# EAGLE board LipoSaverR (EAGLE 6.4)
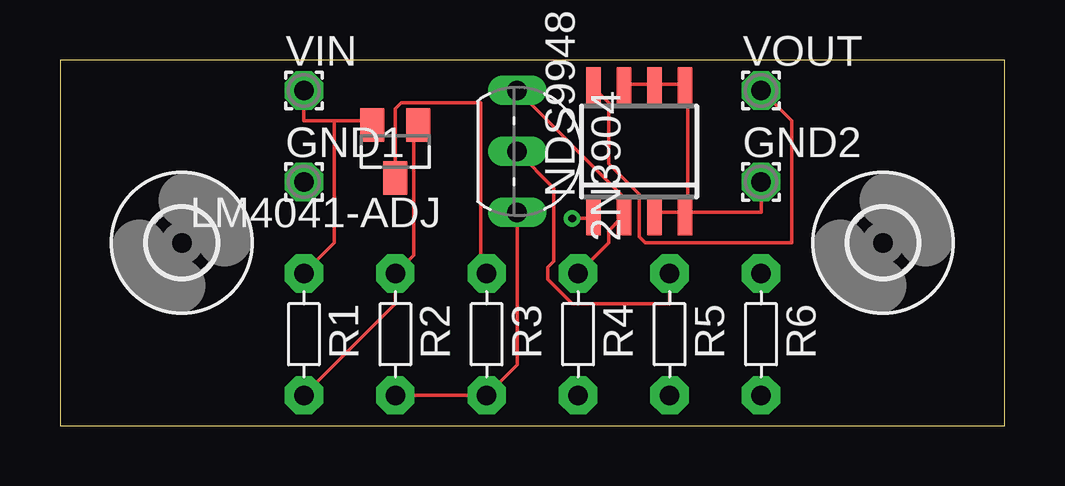
[diagram p0: board, top side]
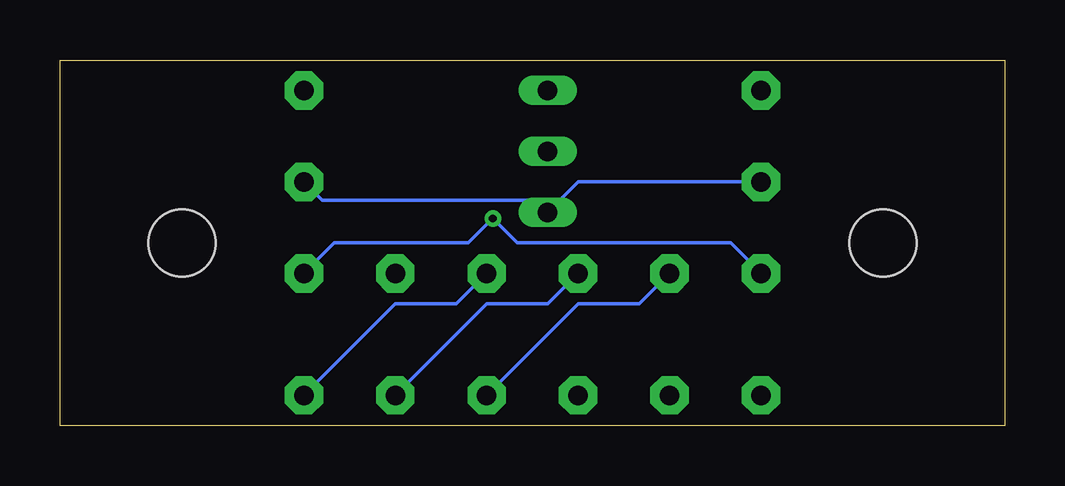
[diagram p1: board, bottom side, seen from below]

Size 39.37 x 15.24 mm. Coordinates in mm from the lower left corner, seen from the top.
Outline: 0,15.24 0,0 39.37,0 39.37,15.24 0,15.24
Copper layers (1*16): Top 0.0356mm / dielectric 1.5011mm / Bottom 0.0356mm
Design rules "LaenPCBOrder": minimum track width 6mil, minimum drill 13mil, track to track 6mil, track to pad 6mil, pad to pad 6mil, via to via 6mil, smd to smd 6mil, copper to edge 15mil, drill to drill 6mil, minimum pad ring 7mil, minimum via ring 7mil, stop-mask expansion 4mil, vias tented up to drill 0mil, thermal gap 10mil

## Footprints (pad centres in the part's own frame; a part is rotated, then mirrored left to right if it is on the bottom)
TO92-EBC = drill 0.813 long: B 0,-1.27; C -2.54,-1.27; E 2.54,-1.27
2,8 = hole 2.8: 0,0
1,6/0,8 = drill 0.813 pad 1.6 octagon: 1 0,0
SOT23 = smd 1 x 1.4: 1 -0.95,-1.1; 2 0.95,-1.1; 3 0,1.1
SOIC8 = smd 0.6 x 1.5: 1 -1.905,-2.75; 2 -0.635,-2.75; 3 0.635,-2.75; 4 1.905,-2.75; 5 1.905,2.75; 6 0.635,2.75; 7 -0.635,2.75; 8 -1.905,2.75
R-5 = drill 0.813 pad 1.6 octagon: 1 -2.54,0; 2 2.54,0

## Placement (x,y rotation side)
2N3904  [TO92-EBC]  20.32,11.43 270 top
E$40  [2,8]  5.08,7.62 0 top
E$42  [2,8]  34.29,7.62 0 top
GND1  [1,6/0,8]  10.16,10.16 0 top
GND2  [1,6/0,8]  29.21,10.16 0 top
LM4041-ADJ  [SOT23]  13.97,11.43 180 top
NDS9948  [SOIC8]  24.13,11.43 0 top
R1  R1  [R-5]  10.16,3.81 270 top
R2  R2  [R-5]  13.97,3.81 270 top
R3  10K  [R-5]  17.78,3.81 270 top
R4  4.7M  [R-5]  21.59,3.81 270 top
R5  100K  [R-5]  25.4,3.81 270 top
R6  20K  [R-5]  29.21,3.81 270 top
VIN  [1,6/0,8]  10.16,13.97 0 top
VOUT  [1,6/0,8]  29.21,13.97 0 top

## Library data of the parts
2N3904 = transistor-npn
E$40 E$42 = holes
GND1 GND2 VIN VOUT = wirepad
LM4041-ADJ = transistor-fet
NDS9948 = linear
R1-R6 = discrete

## Nets
S$1: 2N3904.E GND1.1 GND2.1 NDS9948.3 NDS9948.4 NDS9948.5 NDS9948.6 NDS9948.7 R2.2 R3.2
S$2: LM4041-ADJ.2 NDS9948.1 R1.1 R6.1 VIN.1
S$3: LM4041-ADJ.3 R3.1 R5.2
S$4: 2N3904.C NDS9948.2 R4.1 R6.2
S$5: 2N3904.B R5.1
S$6: NDS9948.8 VOUT.1
S$11: LM4041-ADJ.1 R1.2 R2.1 R4.2

## Tracks (layer width: path | path; a pad name or v marks a point on that pad's centre or on a via)
S$1
  Top 0.152: NDS9948.7 23.62,14.22 24.64,14.22 NDS9948.6 24.89,14.22 25.91,14.22 NDS9948.5 26.16,13.97 26.16,8.89 | NDS9948.3 24.89,8.89 25.91,8.89 NDS9948.4 26.16,8.89 | 26.16,8.89 29.21,8.89 GND2.1 | R2.2 R3.2 19.05,2.54 2N3904.E
  Bottom 0.152: 18.54,9.4 17.78,10.16 GND1.1 | GND2.1 28.45,9.4 18.54,9.4 | 18.54,9.4 2N3904.E
S$2  (via drill 0.33)
  Top 0.152: v21.34,8.64 22.1,8.64 NDS9948.1 | 11.43,12.7 10.16,12.7 VIN.1 | 11.43,12.7 12.95,12.7 LM4041-ADJ.2 | R1.1 11.43,7.62 11.43,12.7
  Bottom 0.152: R6.1 27.94,7.62 22.35,7.62 v21.34,8.64 20.32,7.62 11.43,7.62 R1.1
S$3
  Top 0.152: LM4041-ADJ.3 13.97,13.21 14.22,13.46 17.53,13.46 17.53,6.6 R3.1
  Bottom 0.152: R5.2 21.59,5.08 19.05,5.08 R3.1
S$4
  Top 0.152: R4.1 22.86,7.62 22.86,8.13 23.37,8.64 NDS9948.2 23.37,8.89 23.37,9.65 2N3904.C
  Bottom 0.152: R6.2 25.4,5.08 22.86,5.08 R4.1
S$5
  Top 0.152: 2N3904.B 20.57,9.91 20.57,6.86 20.32,6.6 20.32,6.1 21.34,5.08 25.4,5.08 R5.1
S$6
  Top 0.152: VOUT.1 30.48,12.7 30.48,7.62 24.38,7.62 24.13,7.87 24.13,9.65 22.86,10.92 22.86,13.46 22.35,13.97 NDS9948.8
S$11
  Top 0.152: LM4041-ADJ.1 14.73,12.45 14.73,7.11 R2.1 13.97,5.08 R1.2
  Bottom 0.152: R4.2 17.78,5.08 15.24,5.08 R2.1

## Text on the board
tNames: VIN | VOUT | 3904 | 9948 | GND | 4041-ADJ | GND